# Altium PCB PCB1.PcbDoc
Units mm, origin at the board's own origin, x right, y up, seen from the top; angles counter-clockwise.
Board outline 43.94 x 31.75 mm, 2 copper layers (Top Layer, Bottom Layer); 29 components, 16 nets, 125 pads, 25 vias.
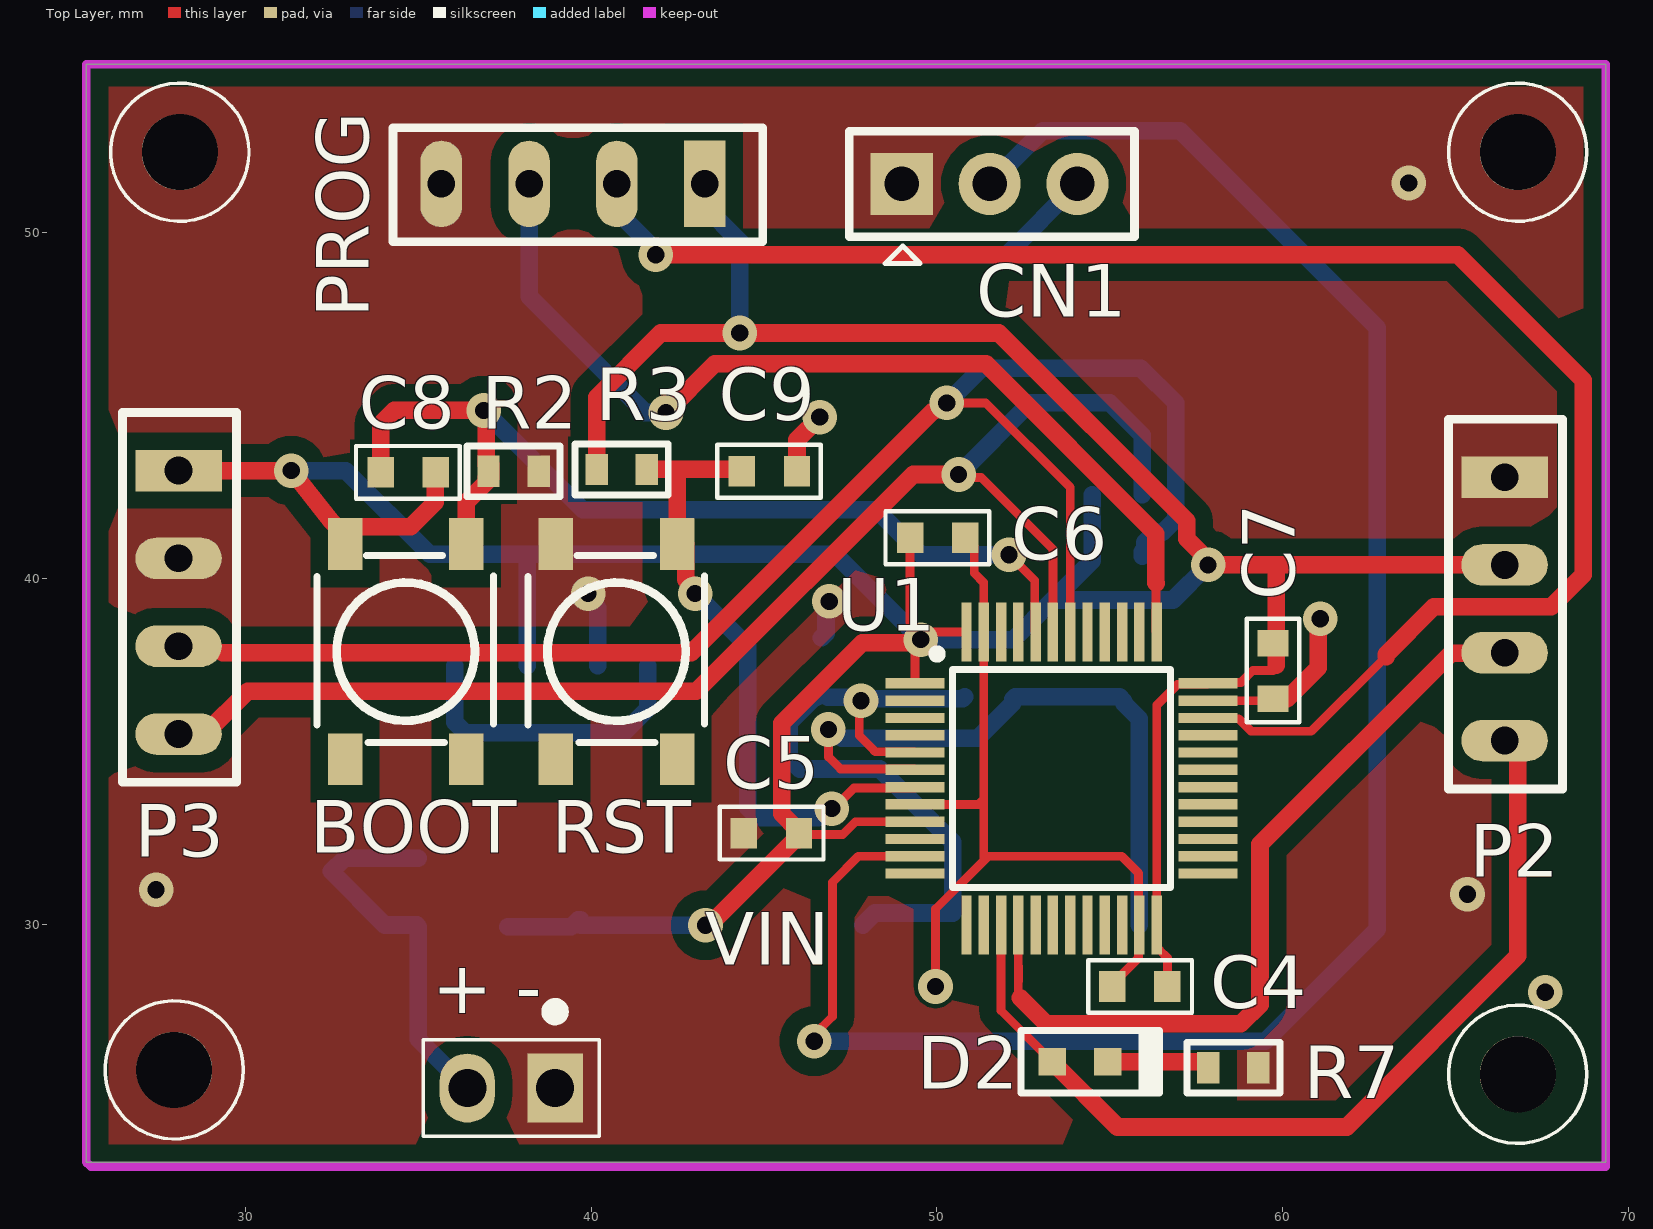
[diagram p0: Top Layer view]
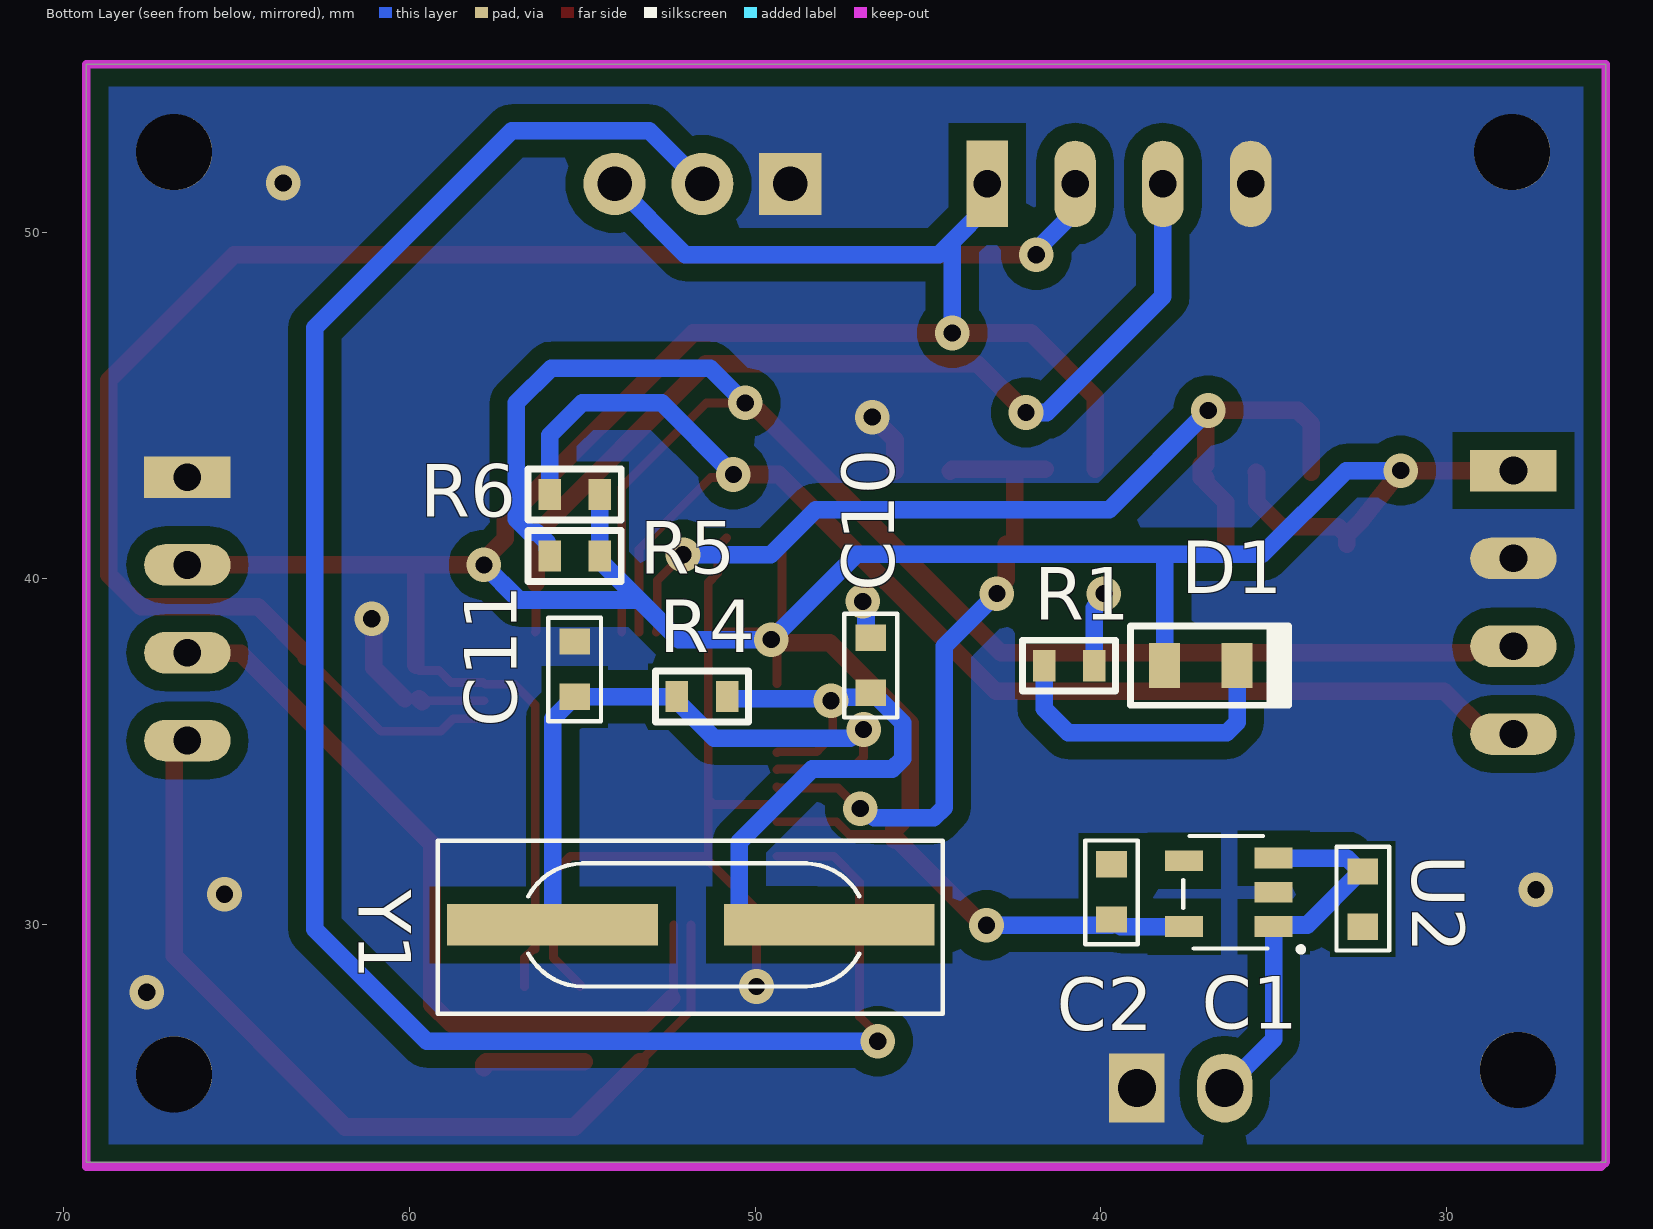
[diagram p1: Bottom Layer view, seen from below]
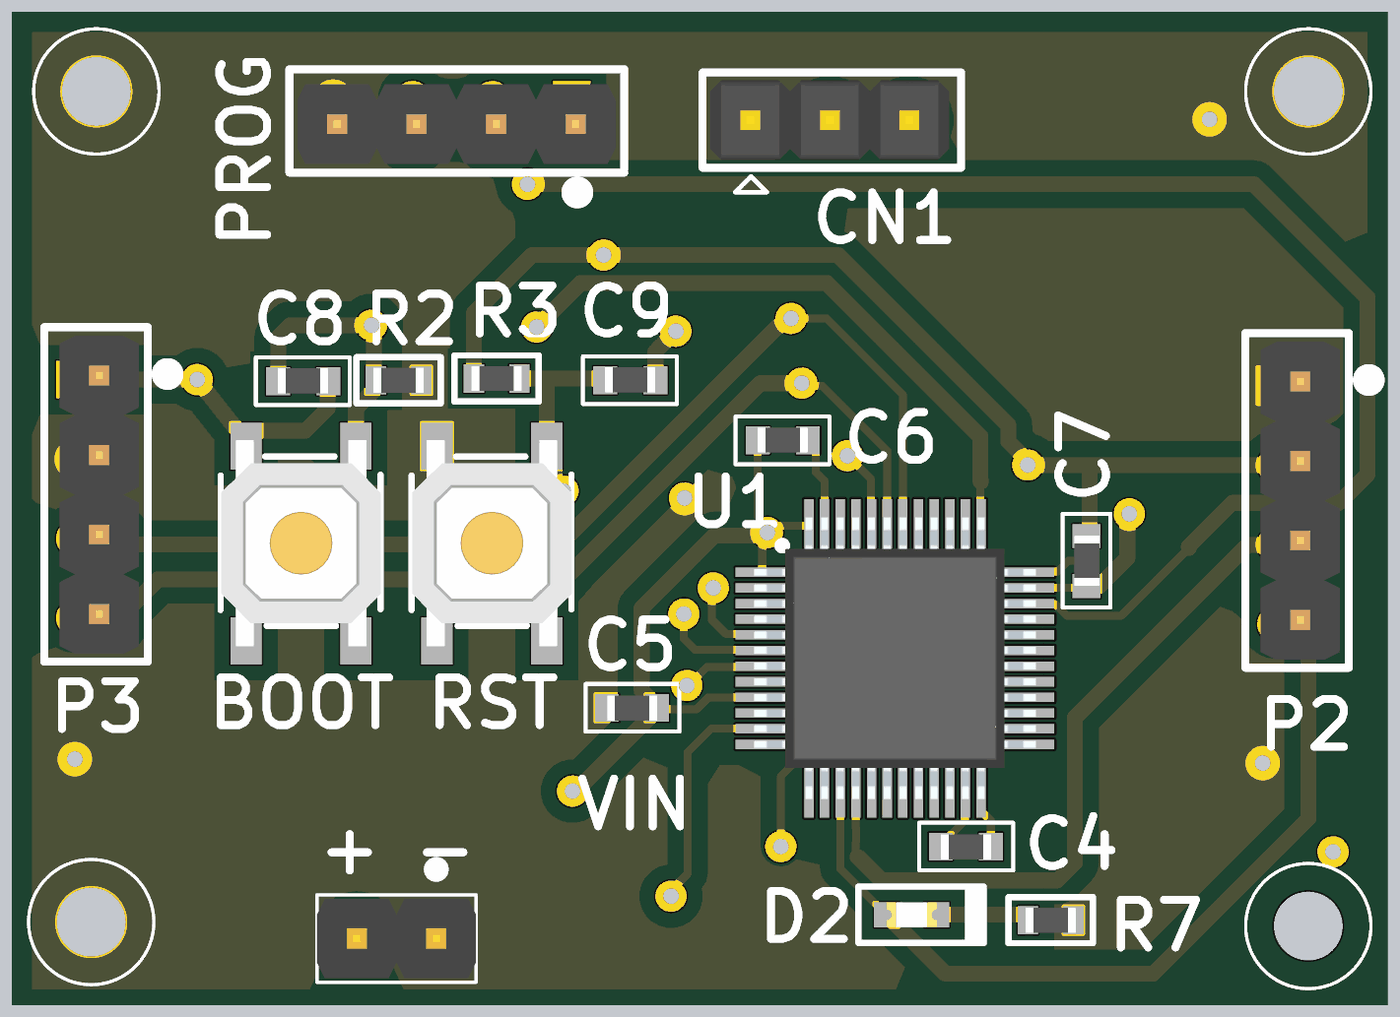
[diagram p2: 3D render of the assembled board from above, using the file's embedded part models]
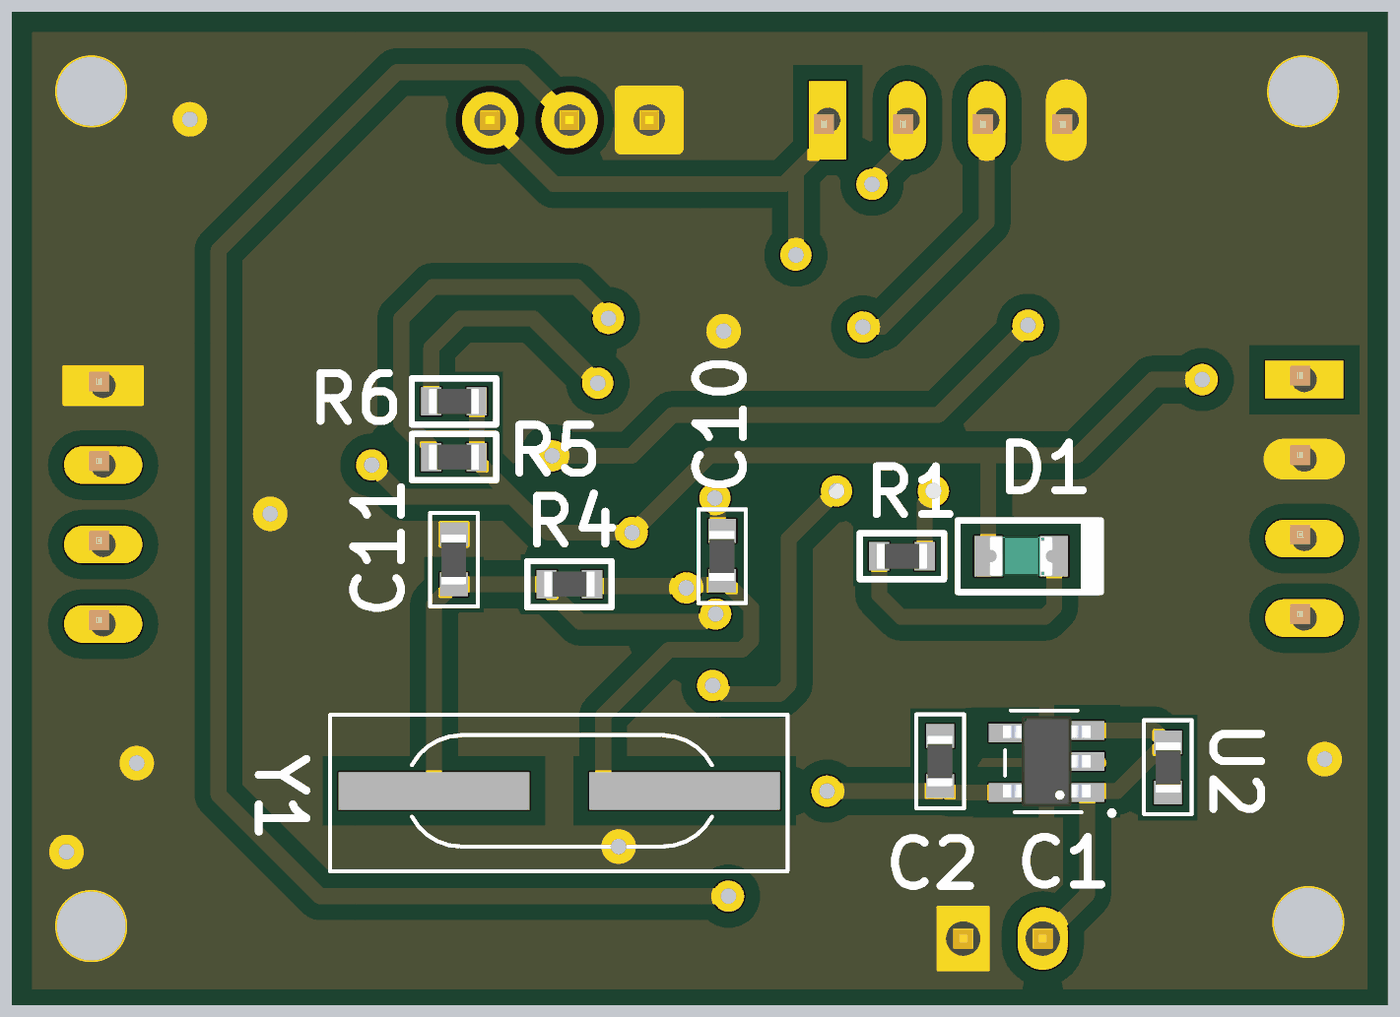
[diagram p3: 3D render of the assembled board from below, using the file's embedded part models]

## Layer stack, top to bottom
Top Solder: solder mask 0.0102, Solder Resist, Dk 3.5
Top Layer: signal copper 0.0356
Dielectric 1: dielectric 0.32, FR-4, Dk 4.8
Bottom Layer: signal copper 0.0356
Bottom Solder: solder mask 0.0102, Solder Resist, Dk 3.5

## Board outline
25.4,23.114 69.342,23.114 69.342,54.864 25.4,54.864

## Design rules (kind name [scope] priority, off if disabled: settings)
BoardOutlineClearance [All] p1: gap=0.2 ignorepadtopadclearanceinfootprint=FALSE
Clearance [All] p1: gap=0.127 ignorepadtopadclearanceinfootprint=TRUE except(0.508: Arc-Fill Arc-Poly Arc-Region Track-Fill Track-Poly Track-Region SMDPad-Fill SMDPad-Poly SMDPad-Region THPad-Fill THPad-Poly THPad-Region Via-Fill Via-Poly Via-Region Fill-Fill Fill-Poly Fill-Region Poly-Poly Poly-Region Region-Region)
ComponentClearance [All] p1: gap=0.127 collisioncheckmode=3 verticalgap=0.127 showdistances=TRUE
DiffPairsRouting [All] p1: maxlimit=0.254 minlimit=0.127 mostfreqgap=0.127 toplayer_minwidth=0.127 toplayer_maxwidth=25.4 toplayer_prefwidth=0.127 bottomlayer_minwidth=0.127 bottomlayer_maxwidth=25.4 bottomlayer_prefwidth=0.127 maxuncoupledlength=12.7
Height [All] p1: minheight=0 maxheight=1816.048 prefheight=12.7
HoleSize [All] p1: absolutevalues=TRUE maxlimit=6.3 minlimit=0.3 maxpercent=80.000 minpercent=20.000
HoleToHoleClearance [All] p1: gap=0.254 allowstackedmicrovias=FALSE
MinimumAnnularRing [All] p1: minimumring=0.152
MinimumSolderMaskSliver [All] p1: minsoldermaskwidth=0.152
PlaneClearance [All] p1: clearance=0
PlaneConnect [All] p1: planeconnectstyle=Relief reliefexpansion=0.3 reliefentries=4 reliefconductorwidth=0.127 reliefairgap=0.127
PolygonConnect [All] p1: connectstyle=Direct reliefconductorwidth=0.127 reliefentries=4 polygonreliefangle="90 Angle" airgapwidth=0.127
RoutingVias [All] p1: holewidth=0.3 width=0.6 viastyle="Through Hole" minholewidth=0.3 minwidth=0.6 maxholewidth=0.6 maxwidth=6.6
SilkToSilkClearance [All] p1: silktosilkclearance=0.127
SilkToSolderMaskClearance [IsPad] p1: minsilkscreentomaskgap=0.127 clearancetoexposedcopper=TRUE
SolderMaskExpansion [All] p1: expansion=0.051 istentingtop=FALSE
SupplyNets "Schematic Supply Nets_2" [InNet('+5')] p1: voltage=0.000
SupplyNets "Schematic Supply Nets_1" [InNet('GND')] p2: voltage=0.000
SupplyNets "Schematic Supply Nets" [InNet('3.3V')] p3: voltage=0.000
UnRoutedNet [All] p1: checkbadconnections=TRUE
Width Width_Default [All] p1: maxlimit=2.54 minlimit=0.254 preferedwidth=0.508 minimp=50.000000 maximp=50.000000 favimp=50.000000
Width Power_40mil [All] p2: maxlimit=2.54 minlimit=0.508 preferedwidth=1.016 minimp=50.000000 maximp=50.000000 favimp=50.000000
19 further rules are at their usual default settings.

## Components (designator, comment, footprint, x,y, rotation, side; value= is the part's Value field where it differs from the comment)
"+ -" "Header 2x1" HDR1X2 37.688,25.255 r270 top
BOOT "TACT 5.2 X 5.2" "TACT 5.2 X 5.2, 1.5mm, 160gf" 34.663,37.902 r270 top
C1 "1uF" C_SMD_0603 32.423,30.734 r90 bottom
C2 "1uF" C_SMD_0603 39.692,30.917 r270 bottom
C4 "0.1uF" C_SMD_0603 55.88,28.194 r0 top
C5 "0.1uF" C_SMD_0603 45.222,32.627 r0 top
C6 "0.1uF" C_SMD_0603 50.012,41.172 r180 top
C7 "0.1uF" C_SMD_0603 59.721,37.331 r90 top
C8 "0.1uF" C_SMD_0603 34.697,43.063 r180 top
C9 "0.1uF" C_SMD_0603 45.141,43.096 r180 top
C10 "22pF" C_SMD_0603 46.655,37.472 r270 bottom
C11 "22pF" C_SMD_0603 55.218,37.36 r270 bottom
CN1 "HEADER 3POS" HDR1X3 48.985,51.406 r90 top
D1 "LED green" LED_0805_GREEN 37.107,37.472 r0 bottom
D2 "LED White" LED_WHITE 54.138,26.016 r180 top
P2 "4X1 Bergstrip" CON4_100_40D72_TH_ST_MALE 66.421,42.926 r0 top
P3 "4X1 Bergstrip" CON4_100_40D72_TH_ST_MALE 28.067,43.116 r0 top
PROG "4X1 Bergstrip" CON4_100_40D72_TH_ST_MALE 43.285,51.406 r270 top
R1 "1K" R_SMD_0603 40.917,37.472 r0 bottom
R2 "10K" R_SMD_0603 37.756,43.094 r0 top
R3 "10K" R_SMD_0603 40.885,43.15 r180 top
R4 "10Mohm" R_SMD_0603 51.535,36.576 r0 bottom
R5 "4.7K" R_SMD_0603 55.218,40.64 r0 bottom
R6 "4.7K" R_SMD_0603 55.218,42.418 r0 bottom
R7 "220" R_SMD_0603 58.576,25.844 r0 top
RST "TACT 5.2 X 5.2" "TACT 5.2 X 5.2, 1.5mm, 160gf" 40.759,37.902 r270 top
U1 "STM32F103C8T6" STM32F103C8T6 53.606,34.21 r0 top
U2 "ap2112k" "SOT23 5" 36.296,30.917 r0 bottom
Y1 "8MHz" XTAL_CRISTAL 47.856,29.972 r0 bottom

## Footprints (in the part's own frame and the unit in brackets; to place one, negate y for a bottom-side part, rotate by r counter-clockwise, add the part's x,y. Pads: shape width x height; smd on the part's side, far side on the other; paste and mask are expansions set on the pad)
C_SMD_0603 [mil]
  rect 30x35 smd: 1(-32,0) 2(31,0)
  silkscreen extent -59,-30 59,30, body extent -32,-16 31,15, height 22
CON4_100_40D72_TH_ST_MALE [mm] "Berg Strip"
  rect 2.5x1.2 hole 0.8: 1(0,0)
  oval 2.5x1.2 hole 0.8: 2(0,-2.54) 3(0,-5.08) 4(0,-7.62)
  round 1.016 on Top Overlay: ""(2.311,0.178)
  silkscreen extent -1.63,-9.02 1.68,1.68, body extent -1.14,-8.76 1.4,1.4, height 8.55
HDR1X2 [mm]
  rect 2x1.6 hole 1.1: 1(0,1.27)
  oval 2x1.6 hole 1.1: 2(0,-1.27)
  silkscreen extent -2.48,-2.54 1.4,2.54, body extent -1.27,-2.54 1.27,2.54, height 8.55
HDR1X3 [mm] "Conector header macho 3 vias"
  rect 1.8x1.8 hole 1 mask+0.2: 1(0,0)
  round 1.8 hole 1 mask+0.2: 2(0,-2.54) 3(0,-5.08)
  silkscreen extent -2.3,-6.73 1.52,1.52, body extent -1.27,-6.35 1.27,1.27, height 9.5
LED_0805_GREEN [mm]
  rect 0.9x1.3 smd: 1(-1.05,0) 2(1.05,0)
  silkscreen extent -2.54,-1.14 2.03,1.14, body extent -1,-0.63 1,0.63, height 0.8
LED_WHITE [mm]
  rect 0.8x0.8 smd: 1(-0.8,0) 2(0.8,0)
  silkscreen extent -2.3,-0.9 1.7,0.9, body extent -0.8,-0.4 0.8,0.4, height 0.4
R_SMD_0603 [mm]
  rect 0.65x0.9 smd: 1(-0.725,0) 2(0.725,0)
  silkscreen extent -1.35,-0.74 1.35,0.74, body extent -0.8,-0.4 0.8,0.4, height 0.55
"SOT23 5" [mm]
  rect 1.1x0.6 smd: 1(-1.295,0.991) 2(-1.295,0) 3(-1.295,-0.991) 4(1.295,-0.914) 5(1.295,0.991)
  silkscreen extent -2.11,-1.63 1.32,1.67, body extent -1.4,-1.45 1.4,1.45, height 1.45
STM32F103C8T6 [mm] "48LQFP"
  rect 1.7x0.3 smd mask+0.076: 1(-4.238,2.75) 2(-4.238,2.25) 3(-4.238,1.75) 4(-4.238,1.25) 5(-4.238,0.75) 6(-4.238,0.25) 7(-4.238,-0.25) 8(-4.238,-0.75) 9(-4.238,-1.25) 10(-4.238,-1.75) 11(-4.238,-2.25) 12(-4.238,-2.75) 25(4.238,-2.75) 26(4.238,-2.25) 27(4.238,-1.75) 28(4.238,-1.25) 29(4.238,-0.75) 30(4.238,-0.25) 31(4.238,0.25) 32(4.238,0.75) 33(4.238,1.25) 34(4.238,1.75) 35(4.238,2.25) 36(4.238,2.75)
  rect 0.3x1.7 smd mask+0.076: 13(-2.75,-4.238) 14(-2.25,-4.238) 15(-1.75,-4.238) 16(-1.25,-4.238) 17(-0.75,-4.238) 18(-0.25,-4.238) 19(0.25,-4.238) 20(0.75,-4.238) 21(1.25,-4.238) 22(1.75,-4.238) 23(2.25,-4.238) 24(2.75,-4.238) 37(2.75,4.238) 38(2.25,4.238) 39(1.75,4.238) 40(1.25,4.238) 41(0.75,4.238) 42(0.25,4.238) 43(-0.25,4.238) 44(-0.75,4.238) 45(-1.25,4.238) 46(-1.75,4.238) 47(-2.25,4.238) 48(-2.75,4.238)
  silkscreen extent -3.72,-3.15 3.15,3.72, body extent -4.5,-4.5 4.5,4.5, height 1.7
"TACT 5.2 X 5.2, 1.5mm, 160gf" [mm]
  rect 1.5x1 smd: 1(-3.086,1.727) 2(3.137,1.727) 3(-3.086,-1.778) 4(3.137,-1.778)
  silkscreen extent -2.76,-2.59 2.65,2.51, body extent -3.28,-2.57 3.3,2.53, height 1.5
XTAL_CRISTAL [mm] "8MHz"
  rect 6.096x1.2 smd: 1(0,0) 2(8,0)
  silkscreen extent -3.29,-2.44 11.32,2.57, body extent -2.99,-2.27 10.9,2.41, height 3.05

## Part data
"+ -": library part HDR1X2, Mfr_Name="Wurth Electronics", RefDes=RefDes, Type=Type
BOOT RST: library part "TACT 5.2 X 5.2, 1.5 MM H, 260GF,", "Interruptor tátil SPST-NA Top atuado Montagem em superfície", Part Number="PTS526 SK15 SMTR2 LFS", ComponentLink1Description="New link", ComponentLink1URL=https://www.digikey.com.br/pt/products/detail/c-k/PTS526-SK15-SMTR2-LFS/10056626, Item="TACT 5.2 X 5.2, 1.5 MM H, 260GF,"
C1 C2: library part CAP_1uF-50V-5%-0603, "1µF ±5% 50V Ceramic Capacitor X7R0603", Case/Package=0603, Manufacturer=Yageo, Manufacturing Part Number=CC0805JKX7R9BB105, Supplier Part Number-1=311-3498-1-ND, Supplier-1=Digikey
C4 C5 C6 C7 C8 C9: library part CAP_0.1uF-50V-5%-0603, "0.1µF ±5% 50V Ceramic Capacitor X7R 0603", Case/Package=0603, Manufacturer=KEMET, Manufacturing Part Number=C0805C104J5RACTU, Supplier Part Number-1=399-1171-1-ND, Supplier-1=Digikey
C10 C11: library part CAP_22pF-50V-5%0603, "22pF ±5% 50V Ceramic Capacitor C0G, NP0 0603", Case/Package=0603, Manufacturer=KEMET, Manufacturer Part Number=C0805C220J5GACTU, Supplier Part Number-1=399-1113-1-ND, Supplier-1=Digikey
CN1: library part HEADER_1X3, "Conector barra de pinos Furo passante, 3 posições (2,54mm)", Item="HEADER MACHO 3POS"
D1: library part LED_0805_GREEN, "WL-SMCD SMT Mono-color Chip LED Diffused", Case Code (Imperial)=0603, Case Code (Metric)=1608, Color=Green, Forward Current=40mA, Forward Voltage=2V, Manufacturer="Wurth Electronics", Manufacturer Part Number=150060VS55040, Max Operating Temperature=85°C, Max Reverse Voltage (DC)=5V, Min Operating Temperature=-40°C, Power Dissipation=48mW, Supplier Part Number 1=732-12017-1-ND, Test Current=20mA, Case/Package=0603, Category=LEDs, ComponentLink1Description=http://www.farnell.com/datasheets/2621647.pdf?src-supplier=Farnell, ComponentLink1URL=http://www.farnell.com/datasheets/2621647.pdf?src-supplier=Farnell, ComponentLink2Description=https://www.we-online.de/web/en/index.php/download/media/07_electronic_components/download_center_1/application_notes_berichte/ano002_leds___the_future_of_horticultural_lighting/ANO002b_EN_LEDs_The_Future_of_Horticultural_Lighting.pdf?src-supplier=Digikey, ComponentLink2URL=https://www.we-online.de/web/en/index.php/download/media/07_electronic_components/download_center_1/application_notes_berichte/ano002_leds___the_future_of_horticultural_lighting/ANO002b_EN_LEDs_The_Future_of_Horticultural_Lighting.pdf?src-supplier=Digikey, ComponentLink3Description=https://katalog.we-online.de/pbs/datasheet/150060VS55040.pdf?src-supplier=Digikey, ComponentLink3URL=https://katalog.we-online.de/pbs/datasheet/150060VS55040.pdf?src-supplier=Digikey, ComponentLink4Description=http://www.farnell.com/datasheets/2621647.pdf?src-supplier=Element14, ComponentLink4URL=http://www.farnell.com/datasheets/2621647.pdf?src-supplier=Element14, ComponentLink5Description=http://www.farnell.com/datasheets/2621647.pdf?src-supplier=Newark, ComponentLink5URL=http://www.farnell.com/datasheets/2621647.pdf?src-supplier=Newark, Dominant Wavelength=573nm, Encapsulamento="0603 SMD", Height=0.5mm, Length=1.6mm, Lens Size=0.8mm, Lens Style=Flat, Lens Transparency=Diffused, Luminous Intensity=60mcd, Mount="Surface Mount", Packaging="Cut Tape", Pricing 1="1=0,19, 10=0,173, 100=0,157, 500=0,141, 1000=0,125 (USD)", Reverse Voltage=5V, RoHS=Yes, RoHS Compliant=Yes, Series=WL-SMDC, Stock 1=10387, Supplier 1=Digikey, Viewing Angle=140°, Wavelength=573nm, Width=0.8mm
D2: library part LED_WHITE, "WL-SMCD SMT Mono-color Chip LED Diffused", Case Code (Imperial)=0603, Case Code (Metric)=1608, Color=Green, Forward Current=40mA, Forward Voltage=2V, Manufacturer="Wurth Electronics", Manufacturer Part Number=150060VS55040, Max Operating Temperature=85°C, Max Reverse Voltage (DC)=5V, Min Operating Temperature=-40°C, Power Dissipation=48mW, Supplier Part Number 1=732-12017-1-ND, Test Current=20mA, Case/Package=0603, Category=LEDs, Dominant Wavelength=573nm, Encapsulamento="0603 SMD", Height=0.5mm, Length=1.6mm, Lens Size=0.8mm, Lens Style=Flat, Lens Transparency=Diffused, Luminous Intensity=60mcd, Mount="Surface Mount", Packaging="Cut Tape", Pricing 1="1=0,19, 10=0,173, 100=0,157, 500=0,141, 1000=0,125 (USD)", Reverse Voltage=5V, RoHS=Yes, RoHS Compliant=Yes, Series=WL-SMDC, Stock 1=10387, Supplier 1=Digikey, Viewing Angle=140°, Wavelength=573nm, Width=0.8mm
P2 P3 PROG: library part HEADER_4X1, "4 pin, 1 row, 2.54mm pitch bergstrip", Case/Package=TH, Manufacturer=NA, Manufacturing Part Number=NA, Supplier Part Number-1=NA, Supplier-1=NA
R1: library part RES_1K-0.125W-1%-0603, "1 kOhms ±1% 0.125W, 1/8W Chip Resisto 0603", Case/Package=0603, Manufacturer=垈㎵á, Manufacturer Part Number=RC0805FR-071KL, Supplier Part Number-1=311-1.00KCRCT-ND, Supplier-1=Digikey
R2 R3 R5 R6 R7: library part RES_10K-0.125W-1%-0603, "10 kOhms ±1% 0.125W, 1/8W Chip Resistor 0603", Case/Package=0603, Manufacturer=Yageo, Manufacturing Part Number=RC0805FR-0710KL, Supplier Part Number-1=311-10.0KCRCT-ND, Supplier-1=Digikey
R4: library part RES_10MOHM-0.125W-1%-0603, "10 MOhms ±1% 0.125W, 1/8W Chip Resistor 0603", Case/Package=0603, Manufacturer="Rohm Semiconductor", Manufacturing Part Number=KTR10EZPF1005, Supplier Part Number-1=RHM10.0MAHCT-ND, Supplier-1=Digikey
U1: library part "IC-STM32F103C8T6 _1", "ARM® Cortex®-M3 STM32F1 Microcontroller IC 32-Bit 72MHz 64KB (64K x 8) FLASH", Case/Package=48-LQFP, Manufacturer=STMicroelectronics, Supplier Part Number-1=497-6063-ND, Manufacturer Part Number=STM32F103C8T6, Supplier-1=Digikey
U2: "IC REG LINEAR 3.3V 600MA SOT-25", Part Number=AP2112K-3.3TRG1, ComponentLink1Description="New link", ComponentLink1URL=https://www.digikey.com.br/pt/products/detail/diodes-incorporated/AP2112K-3-3TRG1/4470746, Item=AP2112K-3.3TRG1
Y1: library part XTAL_8MHZ-LFXTAL030234, "Crystals 8MHz 22pF -20C 70C", Case/Package=SMD, Manufacturer="IQD Frequency Products", Manufacturing Part Number=LFXTAL030234Reel, Supplier Part Number-1=449-LFXTAL030234REEL, Supplier-1=Mouser

## Free pads (board coordinates)
  round 2.2 hole 2.2 unplated: 14(27.94,25.781) 14(28.104,52.324) 14(66.802,25.654) 14(66.802,52.324)

## Via types
v1: diameter 1, hole 0.5, Top Layer to Bottom Layer, 25 vias

## Nets (pads, with @x,y where several pads share a name; then routed paths per layer and width w, separated by ;. In a path a pad name is that pad's centre, name@x,y a point inside that pad or via, vN(x,y) a via of type N, cw(c..) or ccw(c..) an arc to the next point about the centre after c; other vN are vias at no path point)
3.3V: BOOT.3 C2.2 C4.2 C5.2 C6.2 C7.2 C8.1 CN1.3 D1.2 P2.2 P3.1 PROG.1 R3.2 R5.1 R6.1 U1.1 U1.9 U1.24 U1.36 U1.48 U2.5 | length 135.4
  Top Layer w0.254: C5.2@45.992,32.437 C5.2@45.992,32.673 ; C5.2@46.08,32.586 47.27,32.586 47.644,32.96 U1.9 ; C6.2 49.225,38.734 49.53,38.429 v1(49.53,38.227) 49.53,38.133 49.368,37.971 U1.1 ; v1@49.624,38.227 49.845,38.448 U1.48 ; U1.24@56.356,29.272 U1.24 56.356,36.331 56.962,36.937 U1.36@57.821,36.937 ; U1.24@56.438,29.249 56.667,29.019 C4.2 ; U1.36@57.867,36.983 58.792,36.983 59.14,37.331 59.721,37.331
  Top Layer w0.508: P3.1 v1(31.327,43.116) 32.482,41.649 BOOT.3@32.757,41.374 ; BOOT.3 32.885,41.238 33.131,41.484 34.783,41.484 35.492,42.194 35.492,43.045 C8.1 ; R3.2 40.16,45.237 42.018,47.095 v1(44.3,47.095) 51.788,47.095 57.222,41.66 57.222,41.141 57.844,40.519 v1(57.844,40.386) 59.817,40.386 ; v1(43.307,29.965) 43.411,29.965 45.883,32.437 C5.2@45.992,32.437 ; C5.2@45.986,32.762 45.939,32.762 45.514,33.187 45.514,35.803 47.843,38.133 v1@49.436,38.133 ; 59.817,37.49 59.817,40.386 ; P2.2 59.817,40.386
  Bottom Layer w0.508: v1(31.327,43.116) 32.906,43.116 35.33,40.693 38.157,40.693 ; U2.5 39.425,29.926 39.629,30.129 C2.2 ; D1.2 38.157,40.693 ; C2.2@39.692,29.965 v1(43.307,29.965) ; PROG.1 43.285,50.756 44.3,49.741 ; v1(44.3,47.095) 44.3,49.741 ; CN1.3 52.015,49.357 44.684,49.357 44.3,49.741 ; R5.1@54.493,40.515 53.349,39.371 ; R5.1 R6.1 ; v1(57.844,40.386) 56.829,39.371 53.349,39.371 ; 38.157,40.693 47.064,40.693 v1(49.53,38.227) 52.205,38.227 53.349,39.371
+5: "+ -.2" C1.2 U2.1 U2.3 | length 11.1
  Bottom Layer w0.508: U2.1@35.001,29.892 35.001,26.672 36.418,25.255 ; U2.1 34.955,29.972 34.036,29.972 32.487,31.521 32.872,31.907 U2.3
GND: "+ -.1" C4.1 C5.1 C6.1 C7.1 C9.1 C10.1 C11.1 CN1.1 P2.1 P3.2 pad.14 PROG.4 R1.1 R2.2 R7.2 RST.3 U1.8 U1.23 U1.35 U1.47 U2.2 | length 34.1
  Top Layer w0.254: U1.8 51.206,33.46 51.356,33.61 ; v1@49.96,28.204 49.96,30.435 51.356,31.831 ; C6.1 51.079,40.918 51.079,40.151 51.356,39.874 U1.47 51.356,33.61 ; C4.1 55.067,28.258 55.833,29.023 55.833,29.949 U1.23 55.833,29.995 55.833,31.47 55.343,31.96 51.485,31.96 51.356,31.831 ; U1.35 59.663,36.46 C7.1@59.721,36.46 ; 51.356,31.831 51.356,33.61
  Top Layer w0.508: C9.1 45.954,44.008 v1(46.609,44.663) ; C7.1@59.627,36.424 59.663,36.46 C7.1 ; C7.1@60.128,36.518 61.025,37.416 61.025,38.765 v1(61.087,38.827)
  Bottom Layer w0.508: v1(39.911,39.558) 39.911,39.424 40.192,39.144 R1.1 ; C10.1 46.665,38.284 46.792,38.411 46.792,39.236 v1(46.886,39.33)
  other v1: 67.592,28.025 49.96,28.194 65.347,30.861 27.417,30.988 63.651,51.432
NetBOOT_1: BOOT.1 C8.2 R2.1 U1.44 | length 28.4
  Top Layer w0.254: v1(52.086,40.683) 52.833,39.936 52.833,38.471 U1.44
  Top Layer w0.508: C8.2@33.915,43.068 33.915,44.469 34.299,44.853 v1(36.89,44.853) 36.961,44.783 36.961,43.29 36.969,43.282 37.094,43.282 37.094,42.907 36.969,42.907 36.96,42.898 36.96,42.773 36.39,42.203 BOOT.1
  Bottom Layer w0.508: v1(36.89,44.853) 39.759,41.984 48.244,41.984 49.545,40.683 v1(52.086,40.683)
NetC9_2: C9.2 R3.1 RST.1 U1.7 | length 18.6
  Top Layer w0.254: v1(46.957,33.34) 47.009,33.34 47.606,33.937 49.345,33.937 U1.7
  Top Layer w0.508: R3.1 42.486,43.15 ; RST.1 42.486,43.15 ; RST.1@42.732,40.988 42.732,39.964 43.005,39.691 v1(43.005,39.558) ; C9.2 44.3,43.15 42.486,43.15
  Bottom Layer w0.508: v1(43.005,39.558) 44.535,38.028 44.535,33.369 44.832,33.072 46.556,33.072 46.824,33.34 v1(46.957,33.34)
NetC10_2: C10.2 R4.1 U1.5 Y1.1 | length 19.7
  Top Layer w0.254: v1(47.804,36.46) 47.752,36.408 47.752,35.452 48.086,35.118 48.222,34.982 49.346,34.982 U1.5
  Bottom Layer w0.508: C10.2 46.528,36.557 46.465,36.557 45.731,35.824 45.731,34.781 46.029,34.483 48.346,34.483 50.456,32.373 50.456,30.318 48.202,30.318 Y1.1 ; C10.2@46.846,36.557 47.574,36.557 47.671,36.46 v1(47.804,36.46) 47.862,36.518 50.752,36.518 R4.1
NetC11_2: C11.2 R4.2 U1.6 Y1.2 | length 19.4
  Top Layer w0.254: v1(46.863,35.626) 46.863,34.834 47.214,34.483 49.345,34.483 U1.6
  Bottom Layer w0.508: v1(46.863,35.626) 46.996,35.626 47.244,35.378 51.187,35.378 52.189,36.38 52.189,36.505 R4.2 53.18,36.576 53.183,36.573 55.281,36.573 55.408,36.446 55.408,36.382 55.856,35.935 Y1.2
NetCN1_2: CN1.2 U1.11 | length 56.7
  Top Layer w0.254: v1(46.453,26.609) 46.453,26.799 46.981,27.327 46.981,31.211 47.73,31.96 U1.11
  Bottom Layer w0.508: v1(46.453,26.609) 59.496,26.609 62.738,29.852 62.738,47.244 57.041,52.941 53.06,52.941 CN1.2
NetD1_1: D1.1 R1.2 | length 8.9
  Bottom Layer w0.508: D1.1 36.057,35.833 36.354,35.535 40.945,35.535 41.642,36.232 R1.2
NetD2_1: D2.1 R7.1 | length 3
  Top Layer w0.508: D2.1 57.78,26.016 57.851,25.945 R7.1
NetD2_2: D2.2 P2.4 U1.15 | length 27.3
  Top Layer w0.254: U1.15 51.856,27.498 D2.2
  Top Layer w0.508: D2.2 55.224,24.13 61.849,24.13 66.802,29.083 66.802,34.986 66.482,35.306 P2.4
NetP2_3: P2.3 U1.16 | length 23.6
  Top Layer w0.254: U1.16 52.356,28.788 52.364,28.78 52.364,28.354 52.356,28.346 52.356,27.92 52.41,27.866
  Top Layer w0.508: 52.41,27.866 53.161,27.114 58.793,27.114 59.344,27.666 59.344,32.301 64.875,37.832 66.407,37.832 P2.3
NetP3_3: P3.3 R5.2 U1.42 | length 46.5
  Top Layer w0.254: P3.3 28.248,37.855 29.33,37.855 29.339,37.846 ; v1(50.288,45.071) 51.414,45.071 53.856,42.628 U1.42
  Top Layer w0.508: 29.339,37.846 42.899,37.846 49.878,44.825 49.909,44.825 50.155,45.071 v1(50.288,45.071)
  Bottom Layer w0.508: v1(50.288,45.071) 50.294,45.071 51.302,46.079 55.895,46.079 56.903,45.07 56.903,41.705 56.531,41.333 56.312,41.333 56.014,41.035 56.014,40.836 55.943,40.765 R5.2
NetP3_4: P3.4 R6.2 U1.43 | length 40
  Top Layer w0.254: P3.4 P3.4@28.495,35.496 ; v1(50.628,43.002) 50.714,42.915 51.279,42.915 53.356,40.838 U1.43
  Top Layer w0.508: P3.4@28.495,35.496 28.828,35.496 30.067,36.735 43.045,36.735 49.312,43.002 v1(50.628,43.002)
  Bottom Layer w0.508: v1(50.628,43.002) 52.697,45.071 55.005,45.071 55.943,44.133 R6.2
NetPROG_2: PROG.2 U1.34 | length 49.4
  Top Layer w0.254: U1.34 57.867,35.937 58.726,35.937 59.089,35.574 60.829,35.574 62.992,37.738
  Top Layer w0.508: v1(41.871,49.357) 65.07,49.357 68.695,45.732 68.695,40.096 67.775,39.176 64.373,39.176 62.992,37.795 62.992,37.738
  Bottom Layer w0.508: PROG.2 40.745,50.616 41.871,49.49 v1(41.871,49.357)
NetPROG_3: PROG.3 U1.37 | length 28.3
  Top Layer w0.254: 56.347,39.855 56.333,39.841 56.333,38.471 U1.37
  Top Layer w0.508: v1(42.164,44.796) 43.574,46.206 51.419,46.206 56.333,41.292 56.333,39.869 56.347,39.855
  Bottom Layer w0.508: PROG.3 38.205,48.15 41.559,44.796 v1(42.164,44.796)
pads on no net: BOOT.2 BOOT.4 C1.1 C2.1 P2. P3. PROG. RST.2 RST.4 U1.2 U1.3 U1.4 U1.10 U1.12 U1.13 U1.14 U1.17 U1.18 U1.19 U1.20 U1.21 U1.22 U1.25 U1.26 U1.27 U1.28 U1.29 U1.30 U1.31 U1.32 U1.33 U1.38 U1.39 U1.40 U1.41 U1.45 U1.46 U2.4

## Polygon pours and split planes (outlines as drawn)
GND on Top Layer "GND_L01_P000" (solid, pour order 0): 69.342,54.864 69.342,23.114 25.527,23.114 25.463,23.05 25.4,23.114 25.4,54.864
GND on Bottom Layer "GND_L02_P001" (solid, pour order 1): 69.342,54.864 69.342,23.246 25.731,23.246 25.667,23.182 25.604,23.246 25.604,54.864

## Keep-outs
Keep-Out Layer:
  lines w0.254: 25.4,23.114 25.4,54.864 69.342,54.864 69.342,22.987 25.527,22.987 25.4,23.114

## Silkscreen, mask and mechanical layers (free items; w line width, h text height)
Top Overlay:
  circle w0.1: c66.802,25.654 r2
  circle w0.1: c27.94,25.781 r2
  circle w0.1: c28.104,52.324 r2
  circle w0.1: c66.802,52.324 r2
  text "VIN" at 43.307,28.829 h1.52